# Altium PCB PCB1.PcbDoc (part 1 of 2)
Units mil, origin at the board's own origin, x right, y up, seen from the top; angles counter-clockwise.
Board outline 16280 x 10200 mil, 2 copper layers (Top Layer, Bottom Layer); 163 components, 196 nets, 768 pads, 183 vias.
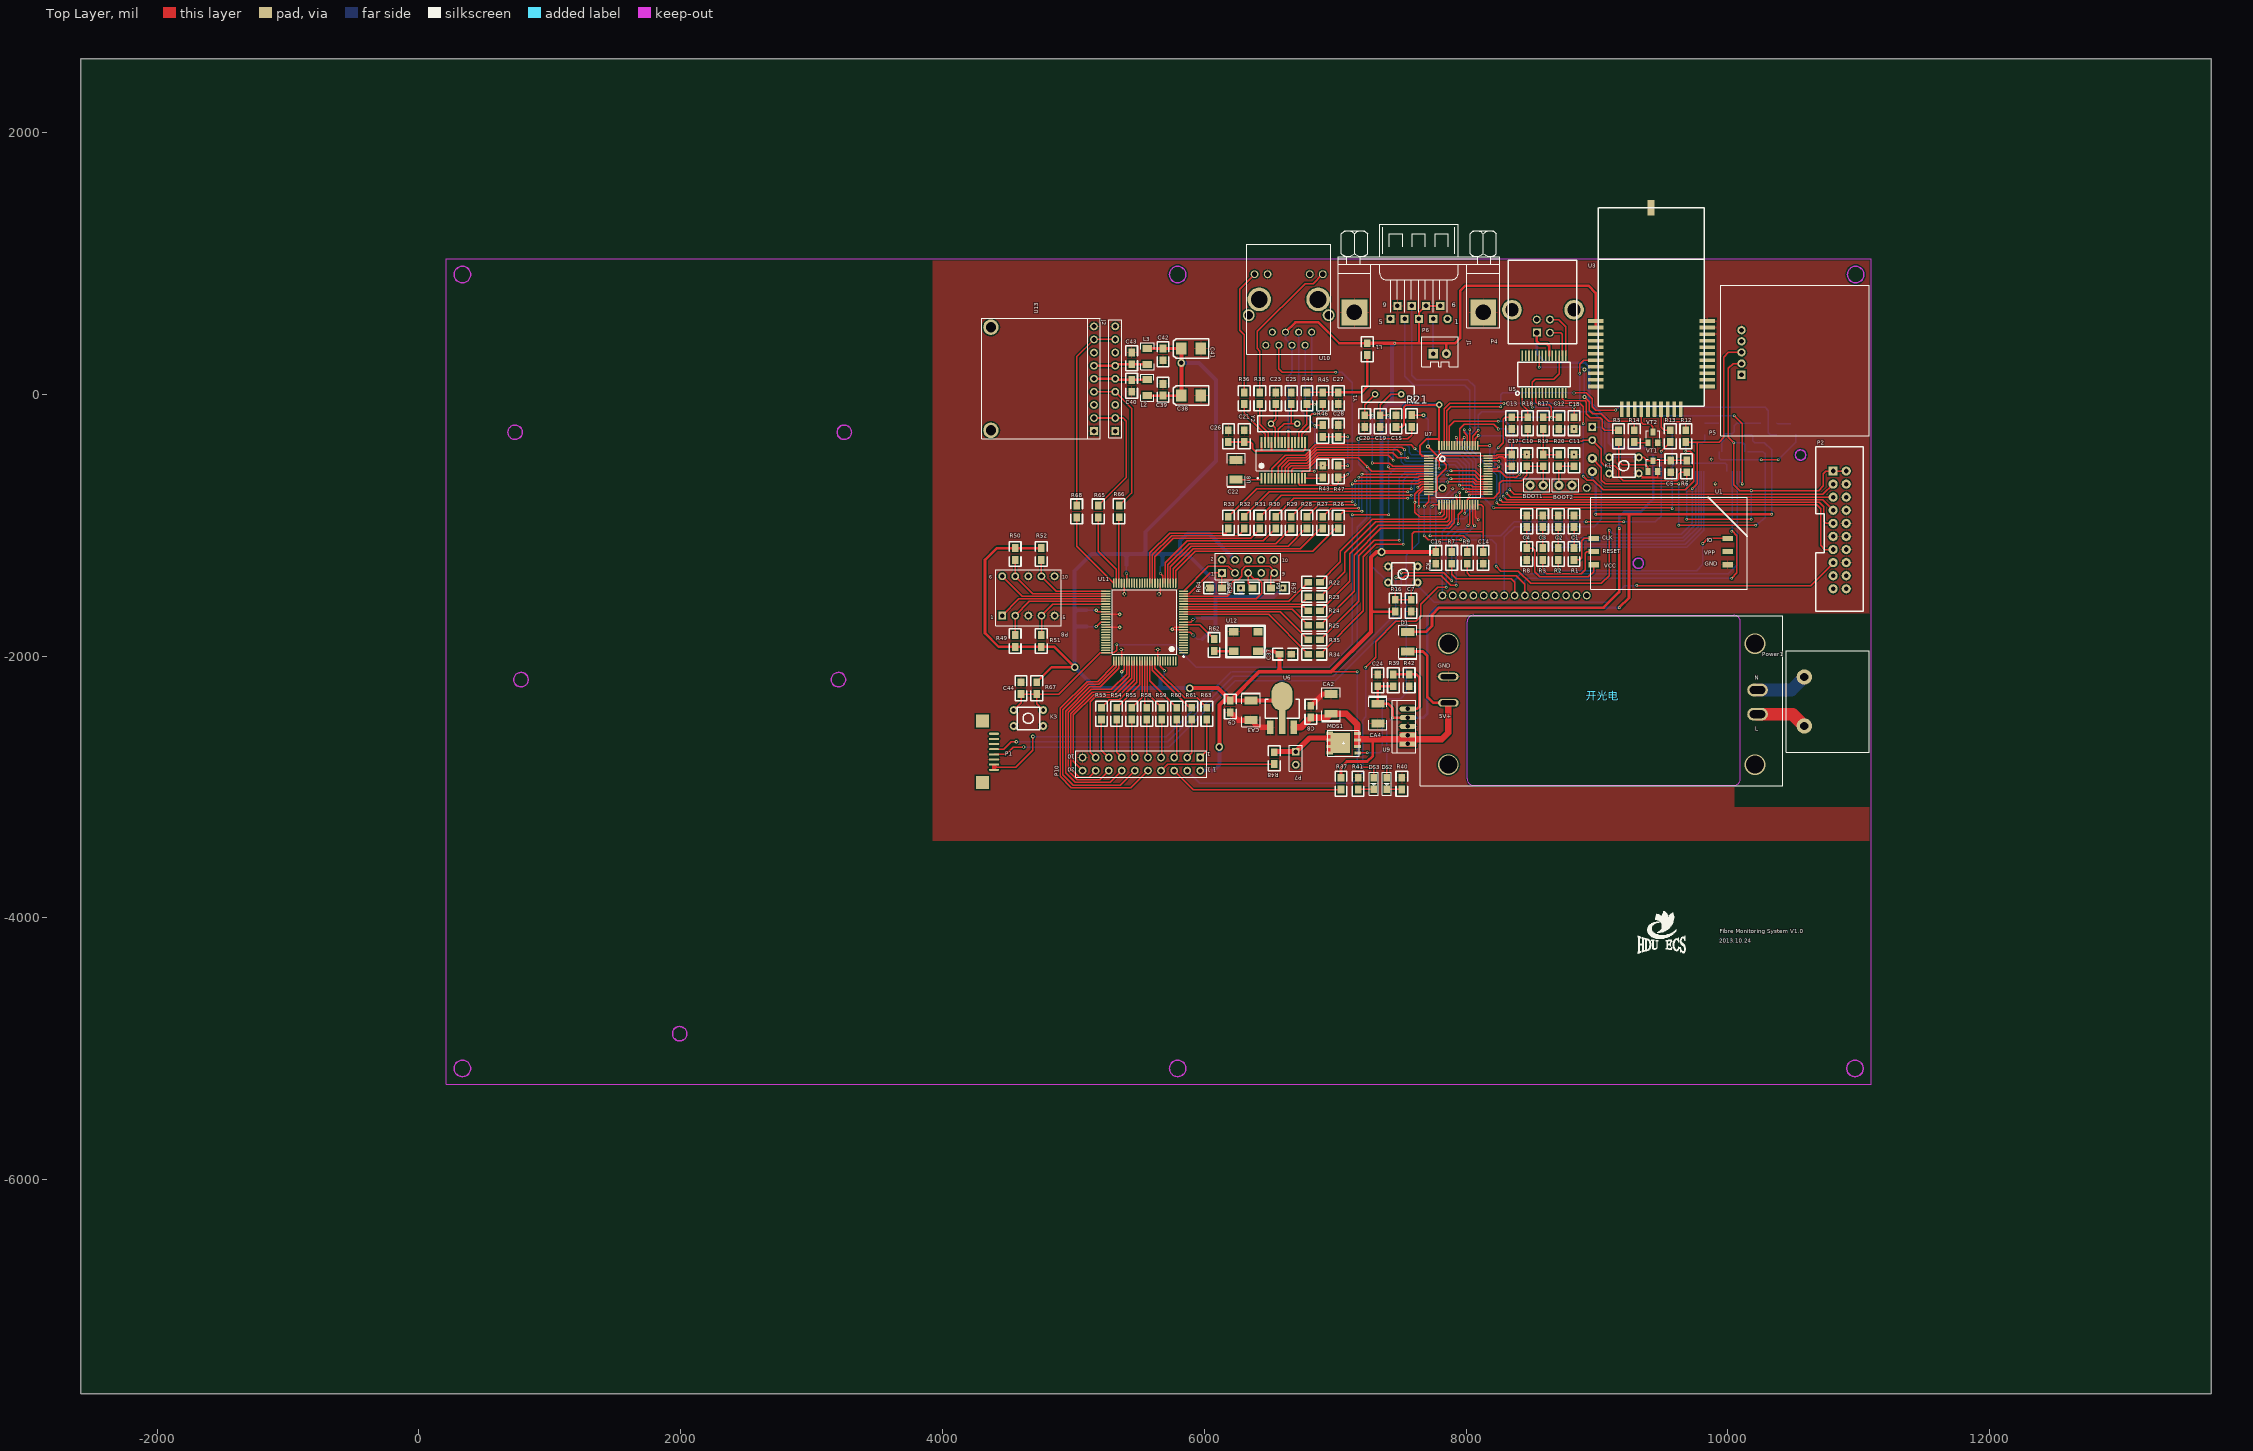
[diagram p0: Top Layer view]
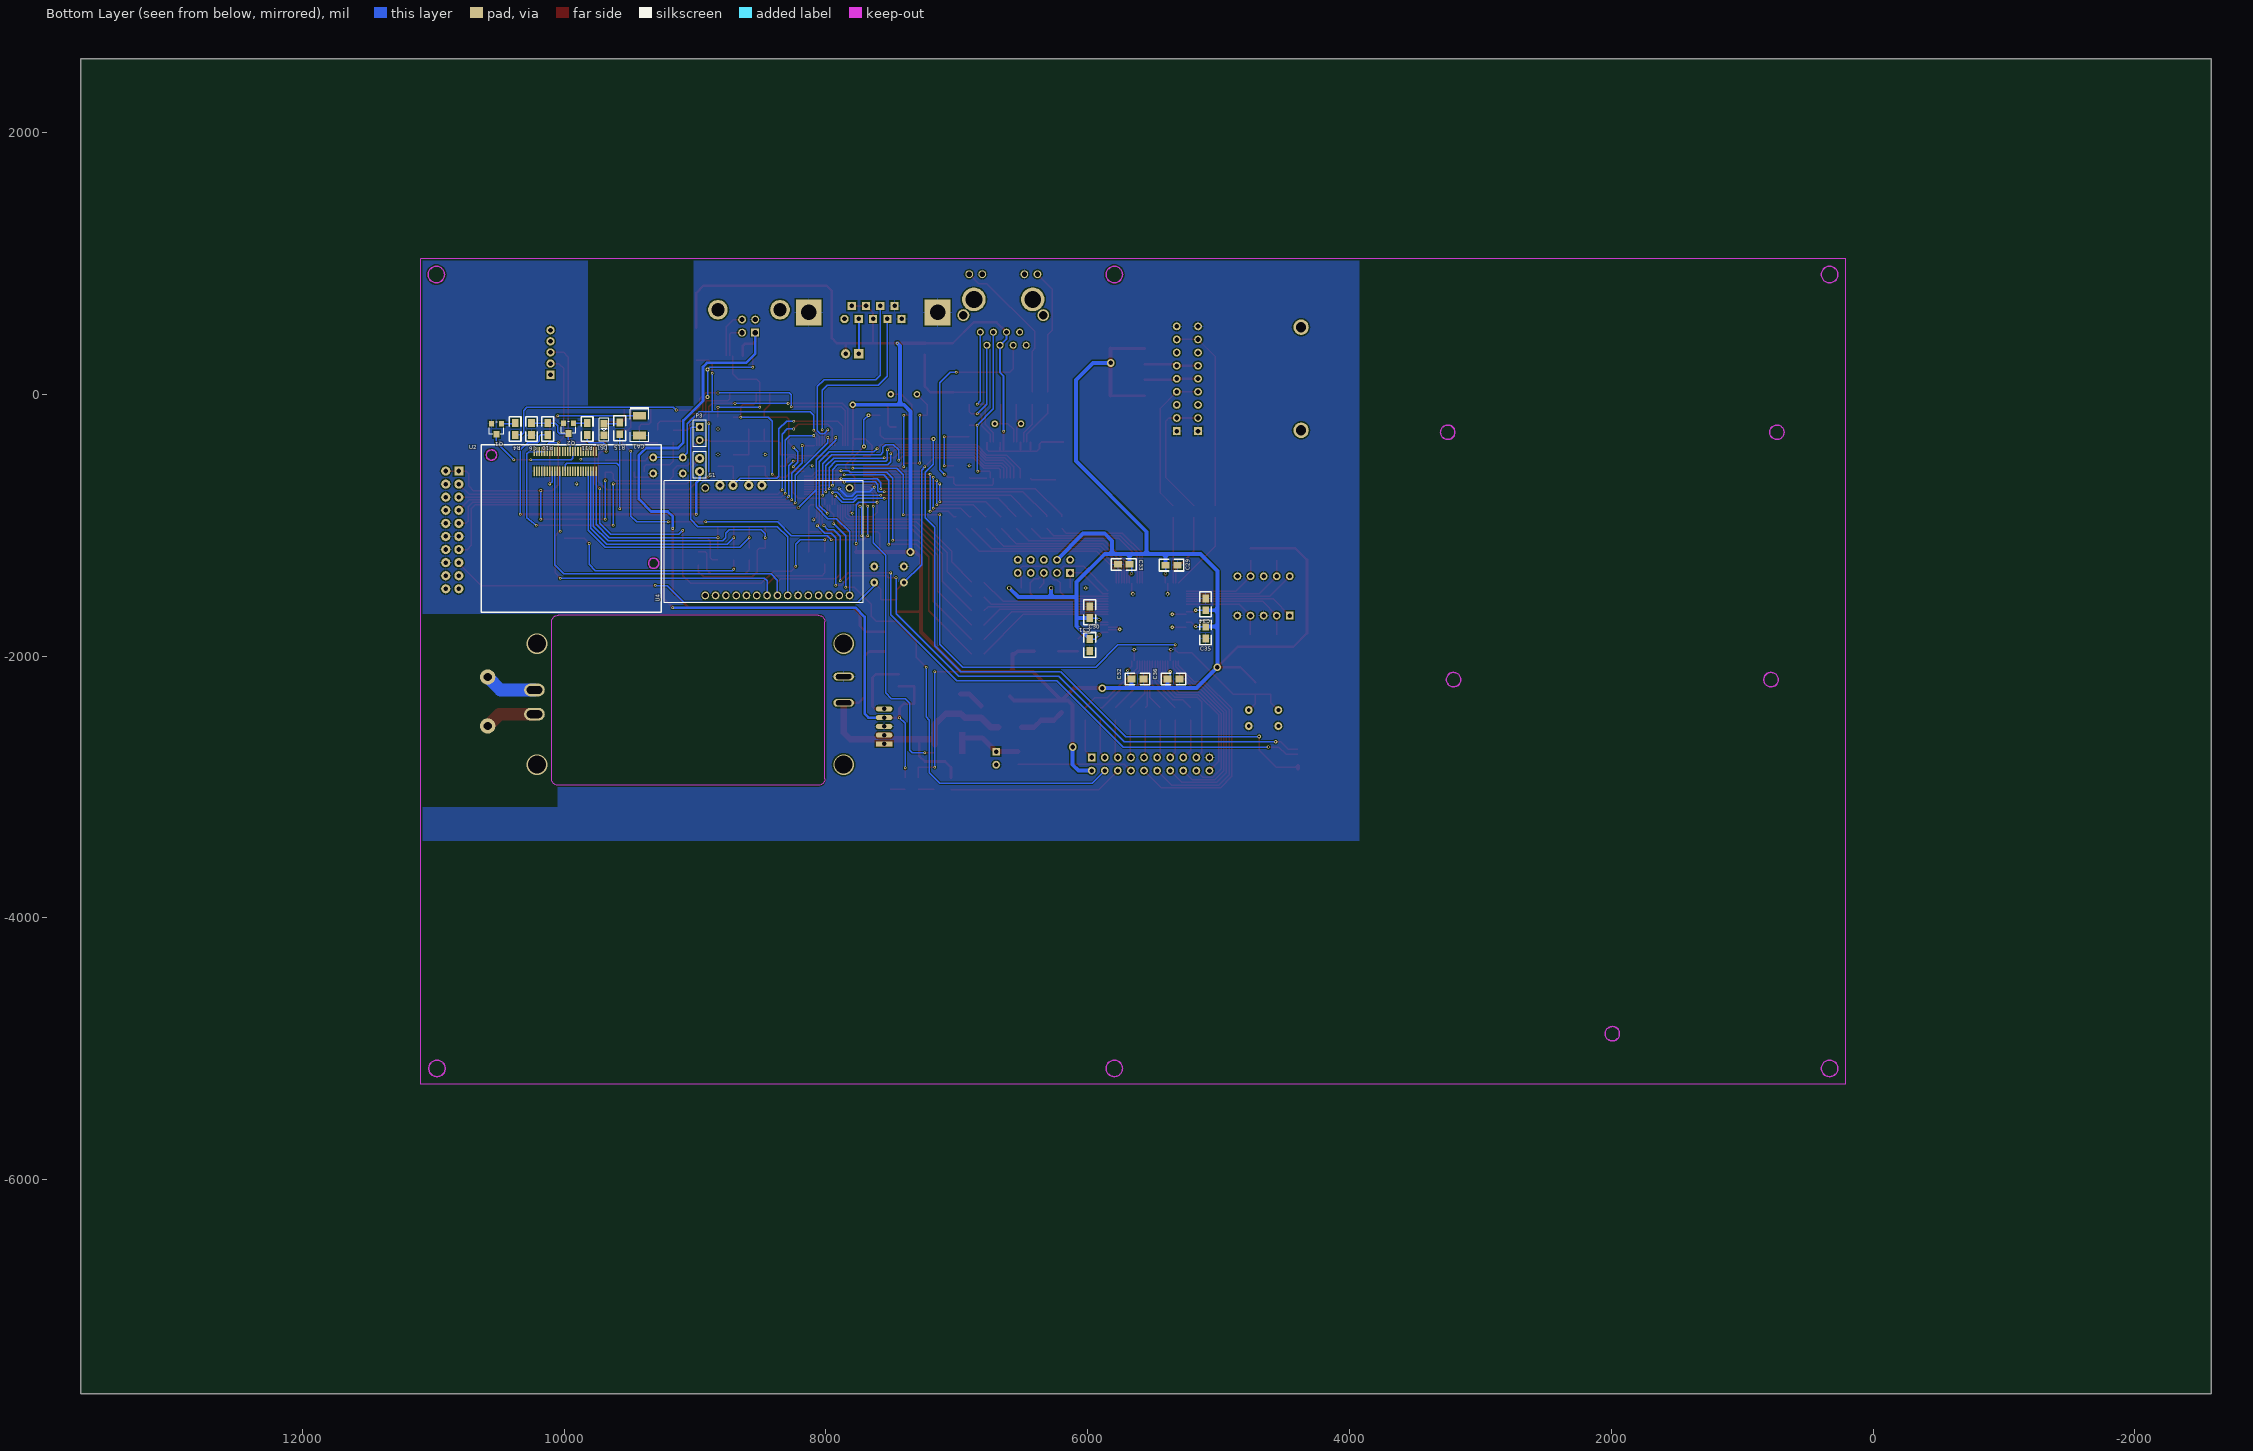
[diagram p1: Bottom Layer view, seen from below]

## Layer stack, top to bottom
Top Layer: signal copper 1.4
Dielectric: dielectric 12.6, FR-4, Dk 4.8
Bottom Layer: signal copper 1.4

## Board outline
-2585,2565 13695,2565 13695,-7635 -2585,-7635 -2585,2560

## Design rules (kind name [scope] priority, off if disabled: settings)
Clearance Clearance_1 [InPolygon] p1: gap=10
Clearance [All] p2: gap=5
HoleSize [All] p1: absolutevalues=TRUE maxlimit=275.59 minlimit=1 maxpercent=80.000 minpercent=20.000
HoleToHoleClearance [All] p1: gap=0 allowstackedmicrovias=TRUE
MinimumSolderMaskSliver [All] p1: minsoldermaskwidth=0
PolygonConnect [All] p1: connectstyle=Relief reliefconductorwidth=10 reliefentries=4 polygonreliefangle="90 Angle"
RoutingVias [All] p1: holewidth=20 width=40 viastyle="Through Hole" minholewidth=10 minwidth=15 maxholewidth=28 maxwidth=50
SilkToSilkClearance [All] p1: silktosilkclearance=0
SilkscreenOverComponentPads [All] p1: minsilkscreentomaskgap=0
SolderMaskExpansion [All] p1: expansion=4
Width [All] p1: maxlimit=118.11 minlimit=10 preferedwidth=10
23 further rules are at their usual default settings.

## Classes and differential pairs
component class 控制板: BOOT1 BOOT2 C1 C2 C3 C4 C5 C6 C7 C8 C9 C10 C11 C12 C13 C14 C15 C16 C17 C18 C19 C20 C21 C22 C23 C24 C25 C26 C27 C28 CA1 CA2 CA3 CA4 D1 DS1 DS2 DS3 J1 K1 K2 L1 M1 MOS MOS1 P1 P2 P3 P4 P5 P6 P7 Power1 Q1 Q2 R1 R2 R3 R4 R5 R6 R7 R8 R9 R10 R11 R12 R13 R14 R15 R16 R17 R18 R19 R20 R21 R22 R23 R24 R25 R26 R27 R28 R29 R30 R31 R32 R33 R34 R35 R36 R37 R38 R39 R40 R41 R42 R43 R44 R45 R46 R47 R48 S1 U1 U2 U3 U4 U5 U6 U7 U8 U9 U10 VT1 VT2 Y1 Y2 开光电 开光电源 开光电源1
component class CPLD: 1 C29 C30 C31 C32 C33 C34 C35 C36 C37 C38 C39 C40 C41 C42 C43 C44 J2 K3 L2 L3 P8 P9 P10 P11 R49 R50 R51 R52 R53 R54 R55 R56 R57 R58 R59 R60 R61 R62 R63 R64 R65 R66 R67 R68 U11 U12 U13 U14

## Components (designator, comment, footprint, x,y, rotation, side; value= is the part's Value field where it differs from the comment)
BOOT1 "SW-SPST" HEAD1*2 8490,-695 r0 top
BOOT2 "SW-SPST" HEAD1*2 8810,-695 r180 top
C1 "33pF" C0805 8825,-1025 r270 top
C2 "33pF" C0805 8705,-1025 r270 top
C3 "33pF" C0805 8585,-1025 r270 top
C4 "104" C0805 8465,-1025 r270 top
C5 "0.1u" C0805 9565,-495 r90 top
C6 "104" C0805 10250,-210 r90 bottom
C7 "104" C0805 7580,-1560 r90 top
C8 "104" C0805 6815,-2370 r90 top
C9 "104" C0805 6200,-2440 r270 top
C10 "104" C0805 8465,-560 r270 top
C11 "104" C0805 8825,-560 r270 top
C12 "101" C0805 8710,-165 r90 top
C13 "101" C0805 8350,-165 r90 top
C14 "104" C0805 8130,-1305 r270 top
C15 "104" C0805 7465,-150 r90 top
C16 "104" C0805 7770,-1305 r270 top
C17 "104" C0805 8350,-560 r270 top
C18 "104" C0805 8825,-275 r270 top
C19 "Cap" C0805 7345,-260 r270 top
C20 "Cap" C0805 7225,-150 r90 top
C21 "Cap Semi" C0805 6305,-265 r90 top
C22 "Cap Pol3" 1210C 6245,-650 r90 top
C23 "Cap Semi" C0805 6545,25 r90 top
C24 "104" C0805 7325,-2130 r90 top
C25 "Cap Semi" C0805 6665,25 r90 top
C26 "Cap Semi" C0805 6185,-265 r90 top
C27 "Cap Semi" C0805 7025,25 r90 top
C28 "Cap Semi" C0805 7025,-335 r270 top
C29 "Cap" C0805 5415,-1305 r0 bottom
C30 "Cap" C0805 5985,-1860 r90 bottom
C31 "Cap" C0805 5985,-1720 r270 bottom
C32 "Cap" C0805 5675,-2175 r0 bottom
C33 "Cap" C0805 5670,-1300 r180 bottom
C34 "Cap" C0805 5100,-1660 r270 bottom
C35 "Cap" C0805 5100,-1765 r90 bottom
C36 "Cap" C0805 5400,-2175 r0 bottom
C37 "Cap" C0805 6565,-1985 r180 top
C38 "106C" 3528 5815,95 r180 top
C39 "0.1uF" C0805 5685,90 r90 top
C40 "0.1uF" C0805 5445,10 r270 top
C41 "106C" 3528 5815,455 r180 top
C42 "1uF" C0805 5685,250 r270 top
C43 "0.1uF" C0805 5445,220 r270 top
C44 "Cap" C0805 4600,-2300 r270 top
CA1 "220uf" 1210C 9425,-165 r270 bottom
CA2 "10UF/16V" 1210C 6970,-2440 r90 top
CA3 "4.7UF/16V" 1210C 6355,-2340 r270 top
CA4 "10uf" 1210C 7325,-2365 r270 top
D1 "IN4001" 1210D 7555,-1820 r270 top
DS1 "LPG" LED0805 9695,-225 r270 bottom
DS2 "VCC4" LED0805 7395,-2930 r270 top
DS3 "VCC3V3" LED0805 7295,-2930 r270 top
J1 "D Connecter 9" "UART - Male" 7640,785 r0 top
J2 "Header 9" HDR1X9 5320,-281.06 r90 top
K1 "KEY" KEY-DIP 9205,-545 r180 top
K2 "KEY" KEY-DIP 7520,-1375 r0 top
K3 "KEY" KEY-DIP 4655,-2475 r180 top
L1 "Inductor" R0805#1 7245,290 r270 top
L2 "1uH" 1206-DC 5565,-10 r90 top
L3 "1uH" 1206-DC 5565,350 r270 top
MOS1 "FDMS7658AS" MOS_FDMS7658AS 7065,-2665 r90 top
P1 "OTDR_USB" chazuo 4315,-2800 r180 top
P2 "Header 10X2" IDC-20 10805,-585 r270 top
P3 "Header 2" HDR1X2 8965,-250 r270 bottom
P4 "USB" USB_B_90D 8540,470 r90 top
P5 "LR9548S" GPS-VK-162 10105,150 r90 top
P6 "Header 2" SIP-2B 7750,310 r0 top
P7 "Header 2" HDR1X2 6700,-2730 r270 top
P8 "Header 5X2A" SN65LVP19 4870,-1425 r270 top
P9 "Header 5X2" HDR2X5 6135,-1365 r0 top
P10 "Header 10X2A" HDR2X10_CEN 5970,-2775 r180 top
Power1 "220VAC" "CON2 - 9.6mm" 10585,-2160 r270 top
Q1 "2N3904" NPN-SOT23 10555,-225 r0 bottom
Q2 "2N3904" NPN-SOT23 10005,-220 r0 bottom
R1 "33" R0805#1 8825,-1165 r90 top
R2 "33" R0805#1 8705,-1165 r90 top
R3 "33" R0805#1 8585,-1165 r90 top
R4 "Res2" R0805#1 10375,-320 r270 bottom
R5 "1K" R0805#1 9165,-265 r90 top
R6 "Res2" R0805#1 9685,-605 r270 top
R7 "22Ω" R0805#1 7890,-1305 r270 top
R8 "15k" C0805 8465,-1165 r90 top
R9 "22Ω" R0805#1 8010,-1305 r270 top
R10 "Res2" R0805#1 10125,-320 r270 bottom
R11 "Res2" R0805#1 9825,-320 r270 bottom
R12 "22ohm" R0805#1 9680,-265 r90 top
R13 "22ohm" R0805#1 9560,-265 r90 top
R14 "1K" R0805#1 9285,-265 r90 top
R15 "1K" R0805#1 9575,-315 r270 bottom
R16 "10k" R0805#1 7460,-1560 r90 top
R17 "3.3k" R0805#1 8590,-165 r90 top
R18 "3.3k" R0805#1 8470,-165 r90 top
R19 "Res2" R0805#1 8590,-450 r90 top
R20 "Res2" R0805#1 8710,-450 r90 top
R21 "Res Semi" R0805#2 7590,-195 r90 top
R22 "Res Semi" R0805#1 6895,-1435 r0 top
R23 "Res Semi" R0805#1 6895,-1545 r0 top
R24 "Res Semi" R0805#1 6895,-1655 r0 top
R25 "Res Semi" R0805#1 6895,-1765 r0 top
R26 "Res Semi" R0805#1 7025,-925 r90 top
R27 "Res Semi" R0805#1 6905,-925 r90 top
R28 "Res Semi" R0805#1 6785,-925 r90 top
R29 "Res Semi" R0805#1 6665,-925 r90 top
R30 "Res Semi" R0805#1 6545,-925 r90 top
R31 "Res Semi" R0805#1 6425,-925 r90 top
R32 "Res Semi" R0805#1 6305,-925 r90 top
R33 "Res Semi" R0805#1 6185,-925 r90 top
R34 "Res Semi" R0805#1 6895,-1985 r0 top
R35 "Res Semi" R0805#1 6895,-1875 r0 top
R36 "Res Semi" R0805#1 6305,25 r90 top
R37 "Res2" R0805#1 7045,-2920 r90 top
R38 "Res Semi" R0805#1 6425,25 r90 top
R39 "220K" R0805#1 7445,-2240 r270 top
R40 "1K" R0805#1 7510,-3030 r270 top
R41 "1K" R0805#1 7175,-3030 r270 top
R42 "100K" R0805#1 7565,-2130 r90 top
R43 "Res Semi" R0805#1 6905,-645 r270 top
R44 "Res Semi" R0805#1 6785,-85 r270 top
R45 "Res Semi" R0805#1 6905,-85 r270 top
R46 "Res Semi" R0805#1 6905,-225 r90 top
R47 "Res Semi" R0805#1 7025,-645 r270 top
R48 "Res Semi" R0805#1 6535,-2835 r270 top
R49 "" R0805#1 4555,-1940 r270 top
R50 "Res2" R0805#1 4555,-1275 r270 top
R51 "Res2" R0805#1 4755,-1940 r270 top
R52 "Res2" R0805#1 4755,-1275 r270 top
R53 "Res2" R0805#1 5215,-2385 r90 top
R54 "Res2" R0805#1 5330,-2385 r90 top
R55 "Res2" R0805#1 5445,-2385 r90 top
R56 "Res2" R0805#1 6270,-1480 r180 top
R57 "Res2" R0805#1 6610,-1480 r0 top
R58 "Res2" R0805#1 5560,-2385 r90 top
R59 "Res2" R0805#1 5675,-2385 r90 top
R60 "Res2" R0805#1 5790,-2385 r90 top
R61 "Res2" R0805#1 5905,-2385 r90 top
R62 "Res2" R0805#1 6075,-1970 r270 top
R63 "Res2" R0805#1 6020,-2385 r90 top
R64 "Res2" R0805#1 6145,-1480 r0 top
R65 "33" R0805#1 5190,-840 r90 top
R66 "33" R0805#2 5355,-885 r90 top
R67 "Res2" R0805#1 4720,-2190 r90 top
R68 "33" R0805#1 5025,-840 r90 top
S1 "SW-SPST" HEAD1*2 8965,-490 r270 bottom
U1 "SIMCARD" SIMCARD 9565,-1130 r270 top
U2 "EM310" EM310 9885,-930 r270 bottom
U3 "STM32W108-3" STM32W108-3 9820,-90 r90 top
U4 "EMW3280" EMW-3280 7820,-715 r0 bottom
U5 "FT232R" SSOP-28 8430,10 r90 top
U6 "AS1117-3.3V" SOT-223 6595,-2310 r0 top
U7 "STM32" LQFP64 7715,-470 r0 top
U8 "ENC28J60" ENC28J60-ss 6605,-505 r90 top
U9 "MIC29302" TO220-5 7555,-2670 r180 top
U10 "HR911105A-RJ45" HR911105A 6645,725 r0 top
U11 "EPM240GT100C5N" TQFP100_N 5545,-1740 r180 top
U12 "oscillator" JZ 6315,-1895 r180 top
U13 "NTR-21613VT" NTR-21613VT 4755,120 r90 top
VT1 "2N3904" SOT23-3 9390,-590 r0 top
VT2 "2N3904" SOT23-3 9390,-370 r0 top
Y1 "8MHZ" XTAL 7505,0 r180 top
Y2 "25M" xtal 6510,-225 r0 top
开光电 "M1" JY-S13-5V 7865,-2830 r0 top

## Footprints (in the part's own frame and the unit in brackets; to place one, negate y for a bottom-side part, rotate by r counter-clockwise, add the part's x,y. Pads: shape width x height; smd on the part's side, far side on the other; paste and mask are expansions set on the pad)
1206-DC [mil]
  rect 52x72 smd: 1(0,0) 2(122,0)
  silkscreen extent -43,-51 164,52
1210C [mil]
  rect 60x100 smd: 1(-1,1) 2(149,1)
  silkscreen extent -61,-69 199,71
1210D [mil]
  rect 60x100 smd: 1(-5,0.06) 2(145,0.06)
  silkscreen extent -55,-70 205,70
3528 [mil]
  rect 80.63x90 smd: 1(-10,105) 2(-160,105)
  silkscreen extent -220,30 50,180
C0805 [mil]
  rect 60x50 smd: 1(-100,0) 2(-10,0)
  silkscreen extent -150,-45 40,45
chazuo [mm]
  rect 2.5x2.5 smd: 0(0.25,4.25) 0(0.25,-7.75)
  oval 2x0.4 smd: 1(-2,-5.25) 2(-2,-4.25) 3(-2,-3.25) 4(-2,-2.25) 5(-2,-1.25) 6(-2,-0.25) 7(-2,0.75) 8(-2,1.75)
"CON2 - 9.6mm" [mm]
  round 3 hole 1.6: 1(0,0) 2(9.5,0)
  silkscreen extent -5.08,-3.56 14.6,12.57
EM310 [mm]
  rect 1.8x0.3 smd: 1(-8.712,3.254) 2(-8.712,2.754) 3(-8.712,2.254) 4(-8.712,1.754) 5(-8.712,1.254) 6(-8.712,0.754) 7(-8.712,0.254) 8(-8.712,-0.246) 9(-8.712,-0.746) 10(-8.712,-1.246) 11(-8.712,-1.746) 12(-8.712,-2.246) 13(-8.712,-2.746) 14(-8.712,-3.246) 15(-8.712,-3.746) 16(-8.712,-4.246) 17(-8.712,-4.746) 18(-8.712,-5.246) 19(-8.712,-5.746) 20(-8.712,-6.246) 21(-8.712,-6.746) 22(-8.712,-7.246) 23(-8.712,-7.746) 24(-8.712,-8.246) 25(-8.712,-8.746) 26(-12.512,-8.746) 27(-12.512,-8.246) 28(-12.512,-7.746) 29(-12.512,-7.246) 30(-12.512,-6.746) 31(-12.512,-6.246) 32(-12.512,-5.746) 33(-12.512,-5.246) 34(-12.512,-4.746) 35(-12.512,-4.246) 36(-12.512,-3.746) 37(-12.512,-3.246) 38(-12.512,-2.746) 39(-12.512,-2.246) 40(-12.512,-1.746) 41(-12.512,-1.246) 42(-12.512,-0.746) 43(-12.512,-0.246) 44(-12.512,0.254) 45(-12.512,0.754) 46(-12.512,1.254) 47(-12.512,1.754) 48(-12.512,2.254) 49(-12.512,2.754) 50(-12.512,3.254)
  Keep-Out Layer circle w0.254: c9.168,14.444 r1
  Keep-Out Layer circle w0.254: c-11.832,-17.056 r1
  silkscreen extent -13.83,-19.06 18.67,15.94
EMW-3280 [mm]
  round 1.5 hole 1: 1(0,0) 15(28,0) 16(28,20.88) 17(26,20.88) 18(24,20.88) 19(22,20.88) 20(20,20.88) 21(18,20.88) 22(16,20.88) 23(14,20.88) 24(12,20.88) 25(10,20.88) 26(8,20.88) 27(6,20.88) 28(4,20.88) 29(2,20.88) 30(0,20.88)
  silkscreen extent -2.62,-1.4 35.98,22.25
ENC28J60-ss [mm] "SOP, 28-Leads, Body 10.5x5.6mm (max), Pitch 0"
  rect 2.05x0.4 smd: 1(-3.475,4.225) 2(-3.475,3.575) 3(-3.475,2.925) 4(-3.475,2.275) 5(-3.475,1.625) 6(-3.475,0.975) 7(-3.475,0.325) 8(-3.475,-0.325) 9(-3.475,-0.975) 10(-3.475,-1.625) 11(-3.475,-2.275) 12(-3.475,-2.925) 13(-3.475,-3.575) 14(-3.475,-4.225) 15(3.475,-4.225) 16(3.475,-3.575) 17(3.475,-2.925) 18(3.475,-2.275) 19(3.475,-1.625) 20(3.475,-0.975) 21(3.475,-0.325) 22(3.475,0.325) 23(3.475,0.975) 24(3.475,1.625) 25(3.475,2.275) 26(3.475,2.925) 27(3.475,3.575) 28(3.475,4.225)
  silkscreen extent -3.6,-5.25 2.05,5.25, body extent -2.8,-5.25 2.8,5.25, height 2
GPS-VK-162 [mm]
  rect 1.6x1.6 hole 0.889: 1(0,0)
  round 1.6 hole 0.889: 2(2.159,0) 3(4.318,0) 4(6.477,0) 5(8.636,0)
  silkscreen extent -11.81,-24.77 17.4,4.06
HDR1X2 [mm] "Conn"
  rect 1.5x1.5 hole 0.9: 1(0,0)
  round 1.5 hole 0.9: 2(2.54,0)
  silkscreen extent -1.27,-1.27 3.81,1.27
HDR1X9 [mm] "Connector; Header; 9 Position"
  rect 1.5x1.5 hole 0.9: 1(0,0)
  round 1.5 hole 0.9: 2(2.54,0) 3(5.08,0) 4(7.62,0) 5(10.16,0) 6(12.7,0) 7(15.24,0) 8(17.78,0) 9(20.32,0)
  silkscreen extent -1.27,-1.27 21.59,1.27
HDR2X5 [mm] "Connector; Header; 5x2 Position"
  rect 1.5x1.5 hole 0.9: 1(0,0)
  round 1.5 hole 0.9: 2(0,2.54) 3(2.54,0) 4(2.54,2.54) 5(5.08,0) 6(5.08,2.54) 7(7.62,0) 8(7.62,2.54) 9(10.16,0) 10(10.16,2.54)
  silkscreen extent -1.27,-1.27 11.43,3.81
HDR2X10_CEN [mm] "Connector; Header; 10x2 Position"
  rect 1.5x1.5 hole 0.9: 1(0,0)
  round 1.5 hole 0.9: 2(2.54,0) 3(5.08,0) 4(7.62,0) 5(10.16,0) 6(12.7,0) 7(15.24,0) 8(17.78,0) 9(20.32,0) 10(22.86,0) 11(0,2.54) 12(2.54,2.54) 13(5.08,2.54) 14(7.62,2.54) 15(10.16,2.54) 16(12.7,2.54) 17(15.24,2.54) 18(17.78,2.54) 19(20.32,2.54) 20(22.86,2.54)
  silkscreen extent -1.27,-1.27 24.13,3.81
HEAD1*2 [mil]
  round 70 hole 35: 1(0,0) 2(100,0)
  silkscreen extent -50,-50 150,50
HR911105A [mm]
  round 1.35 hole 0.89: 1(4.46,-6.35) 2(3.18,-8.89) 3(1.92,-6.35) 4(0.64,-8.89) 5(-0.62,-6.35) 6(-1.9,-8.89) 7(-3.16,-6.35) 8(-4.44,-8.89)
  round 1.5 hole 1.02: 9(6.625,4.9) 10(4.085,4.9) 11(-4.085,4.9) 12(-6.625,4.9)
  round 2.286 hole 1.63: ""(-7.745,-3.05) ""(7.745,-3.05)
  round 4.572 hole 3.25: ""(-5.715,0) ""(5.715,0)
  silkscreen extent -8.13,-10.67 8.13,10.67
IDC-20 [mil]
  rect 70x70 hole 35: 1(1,0)
  round 70 hole 35: 2(1,100) 3(101,0) 4(101,100) 5(201,0) 6(201,100) 7(301,0) 8(301,100) 9(401,0) 10(401,100) 11(501,0) 12(501,100) 13(601,0) 14(601,100) 15(701,0) 16(701,100) 17(801,0) 18(801,100) 19(901,0) 20(901,100)
  silkscreen extent -185,-133 1073,231
JY-S13-5V [mm]
  oval 4x2.5 hole 1.5 slot 3 at 0 deg: 1(60,9.8) 2(60,14.5)
  oval 4x1.5 hole 1 slot 3 at 0 deg: 3(0,12) 4(0,17.1)
  Keep-Out Layer lines w0.127: 11.963,-4.013 55.423,-4.013 ccw(c55.423,-2.743) 56.693,-2.743 56.693,27.737 ccw(c55.423,27.737) 55.423,29.007 4.902,29.007 ccw(c4.902,27.737) 3.632,27.737 3.632,-2.743 ccw(c4.902,-2.743) 4.902,-4.013 12.04,-4.013
  silkscreen extent -5.46,-4.06 64.9,28.96
JZ [mm]
  rect 1.8x1.5 smd: 1(-2.425,-2.076) 2(2.274,-2.076)
  rect 1.9x1.5 smd: 3(2.274,1.734) 4(-2.425,1.734)
  silkscreen extent -3.75,-3.22 3.75,2.88
KEY-DIP [mil]
  round 60 hole 30: 1(-115,59.45) 2(-115,-62.6) 3(111,-62.6) 4(111,59.45)
  silkscreen extent -87,-86 83,87
LED0805 [mm]
  rect 1.4x1.27 smd: 1(0,-0.025) 2(2.21,-0.025)
  silkscreen extent -1.1,-0.91 3.37,0.86
LQFP64 [mm]
  oval 1.8x0.3 smd: 1(0,0)
  rect 1.8x0.3 smd: 2(0,-0.5) 3(0,-1) 4(0,-1.5) 5(0,-2) 6(0,-2.5) 7(0,-3) 8(0,-3.5) 9(0,-4) 10(0,-4.5) 11(0,-5) 12(0,-5.5) 13(0,-6) 14(0,-6.5) 15(0,-7) 16(0,-7.5) 33(11.5,-7.5) 34(11.5,-7) 35(11.5,-6.5) 36(11.5,-6) 37(11.5,-5.5) 38(11.5,-5) 39(11.5,-4.5) 40(11.5,-4) 41(11.5,-3.5) 42(11.5,-3) 43(11.5,-2.5) 44(11.5,-2) 45(11.5,-1.5) 46(11.5,-1) 47(11.5,-0.5) 48(11.5,0)
  rect 0.3x1.8 smd: 17(2,-9.5) 18(2.5,-9.5) 19(3,-9.5) 20(3.5,-9.5) 21(4,-9.5) 22(4.5,-9.5) 23(5,-9.5) 24(5.5,-9.5) 25(6,-9.5) 26(6.5,-9.5) 27(7,-9.5) 28(7.5,-9.5) 29(8,-9.5) 30(8.5,-9.5) 31(9,-9.5) 32(9.5,-9.5) 49(9.5,2) 50(9,2) 51(8.5,2) 52(8,2) 53(7.5,2) 54(7,2) 55(6.5,2) 56(6,2) 57(5.5,2) 58(5,2) 59(4.5,2) 60(4,2) 61(3.5,2) 62(3,2) 63(2.5,2) 64(2,2)
  silkscreen extent 1.43,-8.07 10.07,0.56
MOS_FDMS7658AS [mm]
  rect 3.91x3.75 smd: 0(0,0.635)
  rect 0.61x1.27 smd: 1(1.88,-2.692) 2(0.635,-2.692) 3(-0.635,-2.692) 4(-1.905,-2.718) 5(-1.905,2.667) 6(-0.635,2.667) 7(0.635,2.667) 8(1.905,2.667)
  silkscreen extent -2.54,-3.05 2.54,3.05
NPN-SOT23 [mm]
  rect 1x1.1 smd: 1(0,0) 2(-1.905,0)
  rect 1.1x1.3 smd: 3(-0.953,2.032)
  silkscreen extent -2.35,-0.28 0.44,2.01
NTR-21613VT [mm]
  rect 1.5x1.5 hole 0.9: 1(-10.189,-10.226)
  round 1.5 hole 0.9: 2(-7.649,-10.226) 3(-5.109,-10.226) 4(-2.569,-10.226) 5(-0.029,-10.226) 6(2.511,-10.226) 7(5.051,-10.226) 8(7.591,-10.226) 9(10.131,-10.226)
  round 3 hole 2: 10(-10.029,9.774) 11(9.971,9.774)
  silkscreen extent -11.68,-11.43 11.68,11.56
R0805#1 [mil]
  rect 60x50 smd: 1(-100,0) 2(-10,0)
  silkscreen extent -150,-45 40,45
R0805#2 [mil]
  rect 60x50 smd: 1(-54,6) 2(36,6)
  silkscreen extent -104,-39 86,51
SIMCARD [mil]
  rect 40x80 smd: 1(171.63,-590.25) 2(71.63,-590.25) 3(-28.37,-590.25) 4(171.63,433.37) 5(71.63,433.37) 6(-28.37,433.37)
  silkscreen extent -344,-615 361,583
SIP-2B [mil]
  rect 70x70 hole 35: 1(0,0)
  round 70 hole 35: 2(100,0)
  silkscreen extent -90,-100 190,130
SN65LVP19 [mm]
  rect 1.5x1.5 hole 0.9: 1(6.75,-10.5)
  round 1.5 hole 0.9: 2(6.75,-7.96) 3(6.75,-5.42) 4(6.75,-2.88) 5(6.75,-0.34) 6(-0.893,-10.513) 7(-0.893,-7.973) 8(-0.893,-5.433) 9(-0.893,-2.893) 10(-0.893,-0.353)
  silkscreen extent -2.16,-11.78 8.75,0.92
SOT23-3 [mm]
  rect 1x1.3 smd: 1(0,0) 2(1.9,0) 3(0.95,2.1)
  silkscreen extent -0.35,0.87 2.25,2.35
SOT-223 [mil]
  rect 50x100 smd: 1(-90.5,-234) 3(90.5,-234)
  rect 50x200 smd: 2(0,-184)
  oval 160x220 smd: 2(0,1)
  silkscreen extent -130,-164 130,-19
SSOP-28 [mm]
  rect 2x0.3 smd: 1(0,0) 2(0,-0.65) 3(0,-1.3) 4(0,-1.95) 5(0,-2.6) 6(0,-3.25) 7(0,-3.9) 8(0,-4.55) 9(0,-5.2) 10(0,-5.85) 11(0,-6.5) 12(0,-7.15) 13(0,-7.8) 14(0,-8.45) 15(7.239,-8.45) 16(7.239,-7.8) 17(7.239,-7.15) 18(7.239,-6.5) 19(7.239,-5.85) 20(7.239,-5.2) 21(7.239,-4.55) 22(7.239,-3.9) 23(7.239,-3.25) 24(7.239,-2.6) 25(7.239,-1.95) 26(7.239,-1.3) 27(7.239,-0.65) 28(7.239,0)
  silkscreen extent -0.43,-9.27 5.99,1.32
STM32W108-3 [mm]
  rect 0.7x3 smd: 1(16.51,21.074) 2(15.24,21.074) 3(13.97,21.074) 4(12.7,21.074) 5(11.43,21.074) 6(10.16,21.074) 7(8.89,21.074) 8(7.62,21.074) 9(6.35,21.074) 10(5.08,21.074) 11(3.81,21.074) 22(3.81,-0.627) 23(5.08,-0.627) 24(6.35,-0.627) 25(7.62,-0.627) 26(8.89,-0.627) 27(10.16,-0.627) 28(11.43,-0.627) 29(12.7,-0.627) 30(13.97,-0.627) 31(15.24,-0.627) 32(16.51,-0.627)
  rect 3x0.7 smd: 12(-0.627,16.002) 13(-0.627,14.732) 14(-0.627,13.462) 15(-0.627,12.192) 16(-0.627,10.922) 17(-0.627,9.652) 18(-0.627,8.382) 19(-0.627,7.112) 20(-0.627,5.842) 21(-0.627,4.572)
  rect 3x1.3 smd: ""(38.5,10.314)
  silkscreen extent 0,0 38.5,20.57
TO220-5 [mil]
  rect 126.67x39.17 hole 35: 1(-0.86,1)
  oval 126.67x39.17 hole 35: 2(-0.86,-65.93) 3(-0.86,-132.86) 4(-0.86,-199.79) 5(-0.86,-266.72)
  silkscreen extent -61,-333 119,67
TQFP100_N [mm] "100-Pin Plastic Thin Quad Flat Pack (TQFP100), IPC Medium Density"
  oval 1.8x0.3 smd: 1(-7.55,6) 2(-7.55,5.5) 3(-7.55,5) 4(-7.55,4.5) 5(-7.55,4) 6(-7.55,3.5) 7(-7.55,3) 8(-7.55,2.5) 9(-7.55,2) 10(-7.55,1.5) 11(-7.55,1) 12(-7.55,0.5) 13(-7.55,0) 14(-7.55,-0.5) 15(-7.55,-1) 16(-7.55,-1.5) 17(-7.55,-2) 18(-7.55,-2.5) 19(-7.55,-3) 20(-7.55,-3.5) 21(-7.55,-4) 22(-7.55,-4.5) 23(-7.55,-5) 24(-7.55,-5.5) 25(-7.55,-6) 51(7.55,-6) 52(7.55,-5.5) 53(7.55,-5) 54(7.55,-4.5) 55(7.55,-4) 56(7.55,-3.5) 57(7.55,-3) 58(7.55,-2.5) 59(7.55,-2) 60(7.55,-1.5) 61(7.55,-1) 62(7.55,-0.5) 63(7.55,0) 64(7.55,0.5) 65(7.55,1) 66(7.55,1.5) 67(7.55,2) 68(7.55,2.5) 69(7.55,3) 70(7.55,3.5) 71(7.55,4) 72(7.55,4.5) 73(7.55,5) 74(7.55,5.5) 75(7.55,6)
  oval 0.3x1.8 smd: 26(-6,-7.55) 27(-5.5,-7.55) 28(-5,-7.55) 29(-4.5,-7.55) 30(-4,-7.55) 31(-3.5,-7.55) 32(-3,-7.55) 33(-2.5,-7.55) 34(-2,-7.55) 35(-1.5,-7.55) 36(-1,-7.55) 37(-0.5,-7.55) 38(0,-7.55) 39(0.5,-7.55) 40(1,-7.55) 41(1.5,-7.55) 42(2,-7.55) 43(2.5,-7.55) 44(3,-7.55) 45(3.5,-7.55) 46(4,-7.55) 47(4.5,-7.55) 48(5,-7.55) 49(5.5,-7.55) 50(6,-7.55) 76(6,7.55) 77(5.5,7.55) 78(5,7.55) 79(4.5,7.55) 80(4,7.55) 81(3.5,7.55) 82(3,7.55) 83(2.5,7.55) 84(2,7.55) 85(1.5,7.55) 86(1,7.55) 87(0.5,7.55) 88(0,7.55) 89(-0.5,7.55) 90(-1,7.55) 91(-1.5,7.55) 92(-2,7.55) 93(-2.5,7.55) 94(-3,7.55) 95(-3.5,7.55) 96(-4,7.55) 97(-4.5,7.55) 98(-5,7.55) 99(-5.5,7.55) 100(-6,7.55)
  silkscreen extent -7.68,-6.25 6.25,6.82, body extent -7,-7 7,7, height 1.2
"UART - Male" [mil]
  oct 62x62 hole 35: 1(218.39,-209.25)
  rect 62x62 hole 35: 2(109.22,-209.25) 3(0.05,-209.25) 4(-109.11,-209.25) 5(-218.28,-209.25) 6(163.39,-109.25) 7(54.22,-109.25) 8(-54.95,-109.25) 9(-164.11,-109.25)
  rect 196.67x196.67 hole 118.33: 10(-492.45,-159.25) 11(491.72,-159.25)
  silkscreen extent -617,-276 617,516
USB_B_90D [mil]
  rect 60.06x60.06 hole 40: 1(1,-1)
  round 60.06 hole 40: 2(1,-101) 3(101,-101) 4(101,-1)
  round 150 hole 100: 5(176,-286) 6(176,189)
  silkscreen extent -84,-306 556,219
XTAL [mil]
  round 50 hole 28: 1(0,0) 2(200,0)
  silkscreen extent -100,-60 300,60
xtal [mil]
  round 50 hole 28: 1(0,0) 2(200,0)
  silkscreen extent -100,-60 300,60

## Part data
BOOT1 BOOT2 S1: "Single-Pole, Single-Throw Swit"
C1 C2 C3 C4 C18 C24: library part C
C5 C6 C7 C10 C11 C12 C13: library part Cap, "Capacit"
C14 C15 C16 C17: library part CAP, "Capacit"
C19 C20: "Capacit"
C21 C23 C25 C26 C27 C28: "Capacitor (Semiconductor SIM Mode"
C22: "Polarized Capacitor (Surface Moun"
C29 C30 C31 C32 C33 C34 C35 C36 C37 C44: "Capacitor"
C38 C41: library part "Cap Pol1", "Polarized Capacitor (Radial)"
C39 C40 C42 C43: library part Cap, "Capacitor"
CA1 CA4: library part Ca
CA2 CA3: library part EC
D1: library part DIODE, "Dio"
DS1 DS2 DS3: library part LED3, "Typical BLUE SiC L"
J1: library part UART-male, "9针串口，"
J2: "Header, 9-Pin"
K1 K2: library part K
L1: "Induct"
L2 L3: library part Inductor, "Inductor"
MOS1: library part FDMS7658
P1: library part "Header 8", "Header, 8-P"
P2: "Header, 10-Pin, Dual r"
P3 P7: "Header, 2-Pin"
P4: library part U
P5: library part "Header 5", "Header, 5-P"
P6: "Header, 2-P"
P8 P9: "Header, 5-Pin, Dual row"
P10: "Header, 10-Pin, Dual row"
Power1: library part "Header 2", "Header, 2-P"
Q1 Q2: "NPN General Purpose Amplifi"
R1 R2 R3 R5 R7 R9 R12 R13 R14 R15 R39 R40 R41 R42: library part RES
R4 R6 R10 R11 R19 R20 R37: "Resist"
R8: library part Re
R16 R17 R18: library part Res3, "Resist"
R21 R22 R23 R24 R25 R26 R27 R28 R29 R30 R31 R32 R33 R34 R35 R36 R38 R43 R44 R45 R46 R47 R48: "Semiconductor Resist"
R49 R65 R66 R68: library part Res2, "Resistor"
R50 R51 R52 R53 R54 R55 R56 R57 R58 R59 R60 R61 R62 R63 R64 R67: "Resistor"
U1: library part S
U2: "G"
U3: library part STM32W108
U4: library part EMW32
U5: library part FT23
U6: library part AS11
U7: library part STM32F103
U9: library part MIC293
U10: library part HR911105A-RJ
U11: "MAX II 1.8V CPLD, 80 IOs, 240 Logic Elements, 100-Pin Plastic TQFP, Commercial Temperature, Speed Grade 5, Pb-Free"
U13: library part xinpian
VT1 VT2: library part NPN, "NPN Transist"
Y1 Y2: library part XTAL, "Crystal Oscillat"

## Via types
v1: diameter 19.68, hole 11.81, Top Layer to Bottom Layer, 147 vias
v2: diameter 25.59, hole 13.78, Top Layer to Bottom Layer, 10 vias
v3: diameter 23.62, hole 13.78, Top Layer to Bottom Layer, 8 vias
v4: diameter 30, hole 15, Top Layer to Bottom Layer, 6 vias
v5: diameter 59.06, hole 35.43, Top Layer to Bottom Layer, 5 vias
v6: diameter 157.48, hole 137.8, Top Layer to Bottom Layer, 4 vias
v7: diameter 31.5, hole 19.68, Top Layer to Bottom Layer, 2 vias
v8: diameter 50, hole 28, Top Layer to Bottom Layer, 1 vias

## Nets (pads, with @x,y where several pads share a name; then routed paths per layer and width w, separated by ;. In a path a pad name is that pad's centre, name@x,y a point inside that pad or via, vN(x,y) a via of type N, cw(c..) or ccw(c..) an arc to the next point about the centre after c; other vN are vias at no path point)
/RESET_108: C5.2 K1.2 K1.3 R6.1 U3.7 U7.51 VT1.3 | length 2634.2
  Top Layer w10: U7.51@8049.65,-391.26 8049.65,-320.35 v1(8095,-275) ; v1(8870,160) 8870,230 8900,260 U3.7@8990.32,260 ; K1.2@9320,-482.4 9357.4,-482.4 9382.32,-507.32 VT1.3@9427.4,-507.32 9429.72,-505 C5.2@9565,-505 R6.1@9685,-505
  Bottom Layer w10: v1(8095,-275) 8095,-160 8120,-135 8870,-135 ; v1(8870,160) 8870,-135 ; K1.2@9320,-482.4 K1.3@9094,-482.4 9060,-448.4 9060,-225 8970,-135 8870,-135
/RST: C6.2 Q2.3 R10.1 U2.40 | length 485.1
  Bottom Layer w10: U2.40@9953.76,-437.39 9953.76,-361.24 9967.5,-347.5 Q2.3@9967.5,-300 10035,-300 10050,-285 10050,-240 10070,-220 R10.1@10125,-220 C6.2@10250,-220
BOOT0: BOOT2.2 C11.2 R20.1 U7.60 | length 1675.6
  Top Layer w10: U7.60@7872.48,-391.26 7872.48,-242.52 7910,-205 v1(8245,-205) ; BOOT2.2@8710,-695 R20.1@8710,-550 C11.2@8825,-550
  Bottom Layer w10: v1(8245,-205) 8300,-205 8360,-265 8360,-625 8375,-640 8655,-640 BOOT2.2@8710,-695
BOOT1: BOOT1.2 C10.2 R19.1 U7.28 | length 951.5
  Top Layer w10: U7.28@8010.28,-844.02 8010.28,-804.72 8021.5,-793.5 8211.5,-793.5 8255,-750 8255,-680 8275,-660 8425,-660 8465,-620 C10.2@8465,-550 R19.1@8590,-550 BOOT1.2@8590,-695
CBUS0: R14.2 U5.23 | length 1190.1
  Top Layer w10: v1(8557.95,207.05) U5.23@8557.95,295 ; v4(8905,-20) 8940,-55 8940,-120 8970,-150 9035,-150 9090,-205 9265,-205 9285,-225 R14.2@9285,-275
  Bottom Layer w10: v1(8557.95,207.05) 8887.95,207.05 v4(8905,190) 8905,-5
CBUS2: R5.2 U5.13 | length 660.2
  Top Layer w10: U5.13@8737.09,10 8737.09,-35 8752.09,-50 8910,-50 8920,-60 8920,-150 8950,-180 9025,-180 9040,-195 9040,-255 9060,-275 R5.2@9165,-275
CLK0: R62.1 U11.12 | length 278.5
  Top Layer w11.02: U11.12@5842.24,-1759.68 5964.68,-1759.68 R62.1@6075,-1870
DIG0: P10.20 U11.83 | length 1148.4
  Top Layer w10: P10.20@5070,-2875 5000,-2805 5000,-2450 5155,-2295 5320,-2295 5446.57,-2168.43 U11.83@5446.57,-2037.24
DIG1: P10.19 U11.82 | length 1339.2
  Top Layer w10: P10.19@5170,-2875 5120,-2925 5045,-2925 4980,-2860 4980,-2440 5145,-2275 5305,-2275 5426.89,-2153.11 U11.82@5426.89,-2037.24
DIG2: P10.18 U11.81 | length 1481.8
  Top Layer w10: P10.18@5270,-2875 5200,-2945 5030,-2945 4960,-2875 4960,-2430 5135,-2255 5290,-2255 5407.2,-2137.8 U11.81@5407.2,-2037.24
DIG3: P10.17 U11.78 | length 1567
  Top Layer w10: U11.78@5348.15,-2037.24 5348.15,-2091.85 5205,-2235 5125,-2235 4940,-2420 4940,-2890 5015,-2965 5280,-2965 P10.17@5370,-2875
DIG4: P10.16 U11.77 | length 1712.5
  Top Layer w10: U11.77@5328.46,-2037.24 5328.46,-2081.54 5195,-2215 5115,-2215 4920,-2410 4920,-2905 5000,-2985 5360,-2985 P10.16@5470,-2875
DIG5: P10.15 U11.76 | length 1858
  Top Layer w10: U11.76@5308.78,-2037.24 5308.78,-2071.22 5185,-2195 5105,-2195 4900,-2400 4900,-2920 4985,-3005 5440,-3005 P10.15@5570,-2875
ENC-INT: U7.27 U8.4 | length 2228.2
  Top Layer w10: U8.4@6515.43,-641.81 6515.43,-569.57 6620,-465 6770,-465 6850,-385 7580,-385 v1(7610,-415) ; v1@7990,-915 v1(7990,-910) 7990.59,-909.41 U7.27@7990.59,-844.02
  Bottom Layer w10: v1(7610,-415) 7635,-440 7975,-440 8050,-515 8050,-850 v1(7990,-910)
GND: BOOT1.1 BOOT2.1 C1.1 C2.1 C3.1 C4.1 C5.1 C6.1 C7.1 C8.2 C9.2 C10.1 C11.1 C12.1 C13.1 C14.2 C15.2 C16.2 C17.2 C18.2 C19.2 C20.1 C21.2 C22.2 C23.2 C24.2 C25.2 C26.2 C27.1 C28.1 C29.1 C30.1 C31.1 C32.1 C33.1 C34.1 C35.1 C36.1 C37.1 C38.2 C39.2 C40.2 C41.2 C42.2 C43.1 C44.1 CA1.2 CA2.2 CA3.2 CA4.2 DS1.2 J1.5 J1.9 J1.10 J1.11 J2.1 J2.9 K1.1 K1.4 K2.1 K2.4 K3.1 K3.4 P1.3 P1.6 P2.4 P2.6 P2.8 P2.10 P2.11 P2.12 P2.14 P2.16 P2.18 P2.20 P4.4 P5.5 P7.2 P8.3 P8.5 P8.8 P8.10 P9.2 P9.10 P10.10 Q1.1 Q2.1 R8.1 R40.1 R41.1 R42.1 R43.1 R64.1 U1.4 U2.6 U2.8 U2.21 U2.22 U2.23 U2.24 U2.25 U2.42 U3.30 U3.31 U3.32 U4.15 U4.25 U5.7 U5.18 U5.21 U5.25 U5.26 U6.1 U7.12 U7.18 U7.31 U7.47 U7.63 U8.2 U8.11 U8.18 U8.21 U8.22 U9.3 U10.8 U10.10 U10.11 U11.10 U11.11 U11.32 U11.46 U11.60 U11.65 U11.79 U11.93 U12.2 U13.1 U13.9 VT1.2 VT2.2 开光电.4 | length 2348.6
  Top Layer w10: U11.65@5247.76,-1779.37 v2@5349.37,-1779.37 ; U11.60@5247.76,-1680.94 v2(5354.06,-1680.94) ; v2@5350,-1780 v2@5349.37,-1779.37 ; v2@5354.37,-1779.37 v2@5349.37,-1779.37 ; v2(5365,-1950) 5367.83,-1952.83 U11.79@5367.83,-2037.24 ; U11.46@5387.52,-1442.76 5387.52,-1522.52 v2(5390,-1525) ; U11.93@5643.43,-2037.24 5643.43,-1951.57 v2(5645,-1950) ; v2(5655,-1525) 5663.11,-1516.89 U11.32@5663.11,-1442.76 ; U11.10@5842.24,-1799.06 5759.06,-1799.06 v2(5755,-1795) 5770.63,-1779.37 U11.11@5842.24,-1779.37 ; v1@7632.5,-712.5 7658.47,-686.53 U7.12@7715,-686.53 ; v1(7800,-910) 7813.43,-896.57 U7.18@7813.43,-844.02 ; U7.31@8069.33,-844.02 8069.33,-934.33 v1(8095,-960) ; U7.47@8167.76,-489.68 8236.32,-489.68 8250,-476 8281,-476 8300,-495 8300,-540 8310,-550 C17.2@8350,-550 ; K1.1@9320,-604.45 9350.55,-635 9465,-635 9465,-590.2 VT1.2@9464.8,-590
  Top Layer w39.37: C9.2@6200,-2430 6260,-2490 6356,-2490 6410,-2544 U6.1@6504.5,-2544 ; C8.2@6815,-2380 6905,-2290 CA2.2@6970,-2290
  Bottom Layer w10: v1(7630,-710) 7665,-745 7770,-745 7805,-780 7840,-780 v1(7900,-720)
  other v1: 9905,-685 6905,-545 8105,-545 9875,-495 8465,-460 8825,-460 8825,-265
  other v2: 5355,-1780 6015,-1480
GPIO05: U3.15 VT2.3 | length 241.1
  Top Layer w10: U3.15@9340,-114.68 9340,-215 9355,-230 9410,-230 9427.4,-247.4 VT2.3@9427.4,-287.32
GRD: R65.1 U11.49 | length 560.1
  Top Layer w11.02: R65.1@5190,-940 5190,-1200 5328.46,-1338.46 U11.49@5328.46,-1442.76
GSD: R66.1 U11.48 | length 503.8
  Top Layer w11.02: U11.48@5348.15,-1442.76 R66.1@5348.15,-939
GTD: R68.1 U11.50 | length 620.3
  Top Layer w11.02: R68.1@5025,-940 5025,-1158.98 U11.50@5308.78,-1442.76
I2C1_SCL: U7.58
I2C1_SDA: U7.59
IO1: U11.1
IO2: U11.2
IO3: U11.3
IO4: U11.4
IO5: U11.5
IO6: U11.6
IO7: U11.7
IO8: U11.8
IO14: U11.14
IO15: U11.15
IO16: R34.1 U11.16 | length 1078.7
  Top Layer w10: U11.16@5842.24,-1680.94 6490.94,-1680.94 R34.1@6795,-1985
IO17: R35.1 U11.17 | length 1041.3
  Top Layer w10: U11.17@5842.24,-1661.26 6581.26,-1661.26 R35.1@6795,-1875
IO38: U11.38
IO39: U11.39
IO40: U11.40
IO43: U11.43
IO44: U11.44
IO47: U11.47
IO57: U11.57
IO58: U11.58
IO61: U11.61
IO62: U11.62
IO64: U11.64
IO66: U11.66
IO67: U11.67
IO68: U11.68
IO69: U11.69
IO70: U11.70
IO71: U11.71
IO72: U11.72
IO73: U11.73
IO74: U11.74
IO95: U11.95
IO96: U11.96
IO97: U11.97
IO98: U11.98
IO99: U11.99
IO100: U11.100
JNTRST: P2.3 U7.56 | length 3498.5
  Top Layer w10: U7.56@7951.22,-391.26 7951.22,-263.78 7985,-230 8210,-230 v1(8245,-265) ; v1(8335,-730) 8370,-765 10726,-765 P2.3@10805,-686
  Bottom Layer w10: v1(8245,-265) 8295,-265 8335,-305 v1(8335,-730)
JTCK: P2.9 U7.49 | length 3224.1
  Top Layer w10: U7.49@8090.28,-390 U7.49@8089.02,-391.26 v1(8180,-391.26) ; v1(8260,-805) 8280,-825 10700,-825 10733.83,-858.83 10733.83,-968.83 10751,-986 P2.9@10805,-986
  Bottom Layer w10: v1(8180,-391.26) 8180,-523.79 8260,-603.79 v1(8260,-805)
JTDI: P2.5 U7.50 | length 3234.2
  Top Layer w10: U7.50@8069.33,-391.26 8069.33,-340.67 v1(8095,-315) v1@8090,-315 ; v1@8315,-760 8340,-785 10804,-785 P2.5@10805,-786
  Bottom Layer w10: v1(8095,-315) 8275,-315 8310,-350 v1(8310,-755) v1@8315,-760
JTDO: P2.13 U7.55 | length 3552.1
  Top Layer w10: U7.55@7970.91,-391.26 7970.91,-344.09 v1(7985,-330) ; v1(8235,-830) 8250.3,-845.3 10680.3,-845.3 10710,-875 10710,-1155 10741,-1186 P2.13@10805,-1186
  Bottom Layer w10: v1(7985,-330) 7985,-370 8235,-620 v1(8235,-830)
JTMS: P2.7 U7.46 | length 2931.3
  Top Layer w10: U7.46@8167.76,-509.37 8250,-509.37 v1(8250,-510) ; 8295,-790 8310,-805 10724,-805 P2.7@10805,-886
  Bottom Layer w10: v1(8250,-510) 8285,-545 v1(8285,-780) 8295,-790
L: Power1.2 开光电.1 | length 395
  Top Layer w98.43: 开光电.1@10227.2,-2444.17 10495.16,-2444.17 Power1.2@10585,-2534.02
LED_DP: P10.8 R53.1 | length 312.8
  Top Layer w10: R53.1@5215,-2485 5215,-2720 P10.8@5270,-2775
LED_G_T: P10.9 U11.84 | length 993.2
  Top Layer w10: P10.9@5170,-2775 5130,-2735 5130,-2350 5165,-2315 5335,-2315 5466.26,-2183.74 U11.84@5466.26,-2037.24
LED_SA: P10.1 R63.1 | length 310.7
  Top Layer w10: P10.1@5970,-2775 6020,-2725 R63.1@6020,-2485
LED_SB: P10.2 R61.1 | length 304.5
  Top Layer w10: P10.2@5870,-2775 5905,-2740 R61.1@5905,-2485
LED_SC: P10.3 R60.1 | length 298.3
  Top Layer w10: P10.3@5770,-2775 5790,-2755 R60.1@5790,-2485
LED_SD: P10.4 R59.1 | length 292.1
  Top Layer w10: P10.4@5670,-2775 5675,-2770 R59.1@5675,-2485
LED_SE: P10.5 R58.1 | length 294.1
  Top Layer w10: R58.1@5560,-2485 5560,-2765 P10.5@5570,-2775
LED_SF: P10.6 R55.1 | length 300.4
  Top Layer w10: R55.1@5445,-2485 5445,-2750 P10.6@5470,-2775
LED_SG: P10.7 R54.1 | length 306.6
  Top Layer w10: R54.1@5330,-2485 5330,-2735 P10.7@5370,-2775
LPG: R15.2 U2.13 U4.30 U7.57 | length 4319.7
  Top Layer w10: v1(7925,-330) 7931.54,-336.54 U7.57@7931.54,-391.26 ; v1(8210,-865) 9565,-865 v1(9575,-875)
  Bottom Layer w10: U4.30@7820,-1537.05 7820,-1050 7920,-950 7985,-950 8075,-860 8075,-730 ; v1(7925,-330) 7925,-350 8075,-500 ; v1(8210,-865) 8075,-730 ; v1(9575,-875) 9575,-550 ; R15.2@9575,-305 9575,-550 ; U2.13@9993.13,-587 9993.13,-538.13 9980,-525 9600,-525 9575,-550 ; 8075,-730 8075,-500 ; 8075,-730 8075,-500
N: Power1.1 开光电.2 | length 398.9
  Bottom Layer w98.43: 开光电.2@10227.2,-2259.13 10485.87,-2259.13 Power1.1@10585,-2160
NetC1_2: C1.2 R1.2 U2.1 | length 1540.2
  Top Layer w10: R1.2@8825,-1175 v1(8825,-1095) C1.2@8825,-1015
  Bottom Layer w10: v1(8825,-1095) 9655,-1095 9756.91,-993.09 U2.1@9756.91,-587
NetC2_2: C2.2 R2.2 U2.3 | length 1758.9
  Top Layer w10: R2.2@8705,-1175 v1(8705,-1095) C2.2@8705,-1015
  Bottom Layer w10: v1(8705,-1095) 8755,-1145 9675,-1145 9796.28,-1023.72 U2.3@9796.28,-587
NetC3_2: C3.2 R3.2 U2.4 | length 1928.3
  Top Layer w10: R3.2@8585,-1175 v1(8585,-1095) C3.2@8585,-1015
  Bottom Layer w10: v1(8585,-1095) 8660,-1170 9685,-1170 9815.96,-1039.04 U2.4@9815.96,-587
NetC18_1: C18.1 U5.4 U5.17 | length 954
  Top Layer w10: v1(8506.77,-98.23) U5.4@8506.77,10 8506.77,91.77 8530,115 8670,115 8711.5,156.5 U5.17@8711.5,295 ; C18.1@8825,-175 v1(8825,-100)
  Bottom Layer w10: v1(8506.77,-98.23) 8508.54,-100 v1(8825,-100)
NetC19_1: C19.1 U7.6 Y1.1 | length 1043.7
  Top Layer w10: v1(7405,-555) 7418.43,-568.42 U7.6@7715,-568.42 ; v1(7405,-160) C19.1@7345,-160 7345,-80 7425,0 Y1.1@7505,0
  Bottom Layer w10: v1(7405,-555) v1(7405,-160)
NetC20_2: C20.2 U7.5 Y1.2 | length 1058
  Top Layer w10: v1(7285,-525) 7415,-525 7438.74,-548.74 U7.5@7715,-548.74 ; v1(7285,-160) C20.2@7225,-160 7225,-80 Y1.2@7305,0
  Bottom Layer w10: v1(7285,-525) v1(7285,-160)
NetC22_1: C22.1 U8.1 | length 198.5
  Top Layer w10: C22.1@6244,-651 6429.47,-651 U8.1@6438.66,-641.81
NetC23_1: C23.1 U8.24 Y2.1 | length 320.5
  Top Layer w10: U8.24@6541.02,-368.19 6541.02,-256.02 Y2.1@6510,-225 6545,-190 C23.1@6545,-75
NetC25_1: C25.1 U8.23 Y2.2 | length 511.2
  Top Layer w10: U8.23@6566.61,-368.19 6566.61,-268.39 6610,-225 ; C25.1@6665,-75 6665,-225 ; 6610,-225 6665,-225 ; 6610,-225 6665,-225 ; 6665,-225 Y2.2@6710,-225 6665,-225
NetC27_2: C27.2 L1.2 R44.1 R45.1 | length 718.6
  Top Layer w10: R44.1@6785,15 R45.1@6905,15 C27.2@7025,15
  Top Layer w20: C27.2@7025,15 7200,15 7245,60 L1.2@7245,300
NetC28_2: C28.2 R46.1 R47.1 | length 480
  Top Layer w10: R46.1@6905,-325 C28.2@7025,-325 v1(7095,-325) ; R47.1@7025,-545 v1(7095,-545)
  Bottom Layer w10: v1(7095,-545) v1(7095,-325)
NetCA1_1: CA1.1 U2.18 | length 1277.5
  Top Layer w10: v1(10050,-164) 10110,-224 v1(10110,-685)
  Bottom Layer w10: CA1.1@9424,-164 v1(10050,-164) ; U2.18@10091.55,-587 10091.55,-666.55 v1(10110,-685)
NetD1_1: D1.1 P4.1 U5.20 | length 4890.4
  Top Layer w20: D1.1@7555.06,-1815 7695,-1815 7740,-1770 7740,-1685 7795,-1630 9050,-1630 9170,-1510 v1(9170,-1025) ; P4.1@8541,471 8541,404 8560,385 8620,385 8634.72,370.28 U5.20@8634.72,295
  Bottom Layer w20: P4.1@8541,471 8541,309 8610,240 8910,240 8940,210 8940,-50 9090,-200 9090,-370 9130,-410 9375,-410 9430,-465 9430,-800 9335,-895 9210,-895 9170,-935 v1(9170,-1025)
NetDS1_1: DS1.1 R15.1 | length 125.1
  Bottom Layer w10: R15.1@9575,-215 9585,-225 DS1.1@9696,-225
NetDS2_2: DS2.2 R40.2 | length 117.2
  Top Layer w10: DS2.2@7394,-3017.01 7507.01,-3017.01 R40.2@7510,-3020